# Altium PCB M2RB.PcbDoc (part 2 of 2)
Units mil, origin at the board's own origin, x right, y up, seen from the top; angles counter-clockwise.
Board outline 4750 x 3250 mil, 6 copper layers (Top Layer, Layer 1, Layer 2, Layer 3, Layer 4, Bottom Layer), stack 62.874 mil thick; 218 components, 161 nets, 1048 pads, 77 vias.
Unrouted connection lines stored in the file: 530.
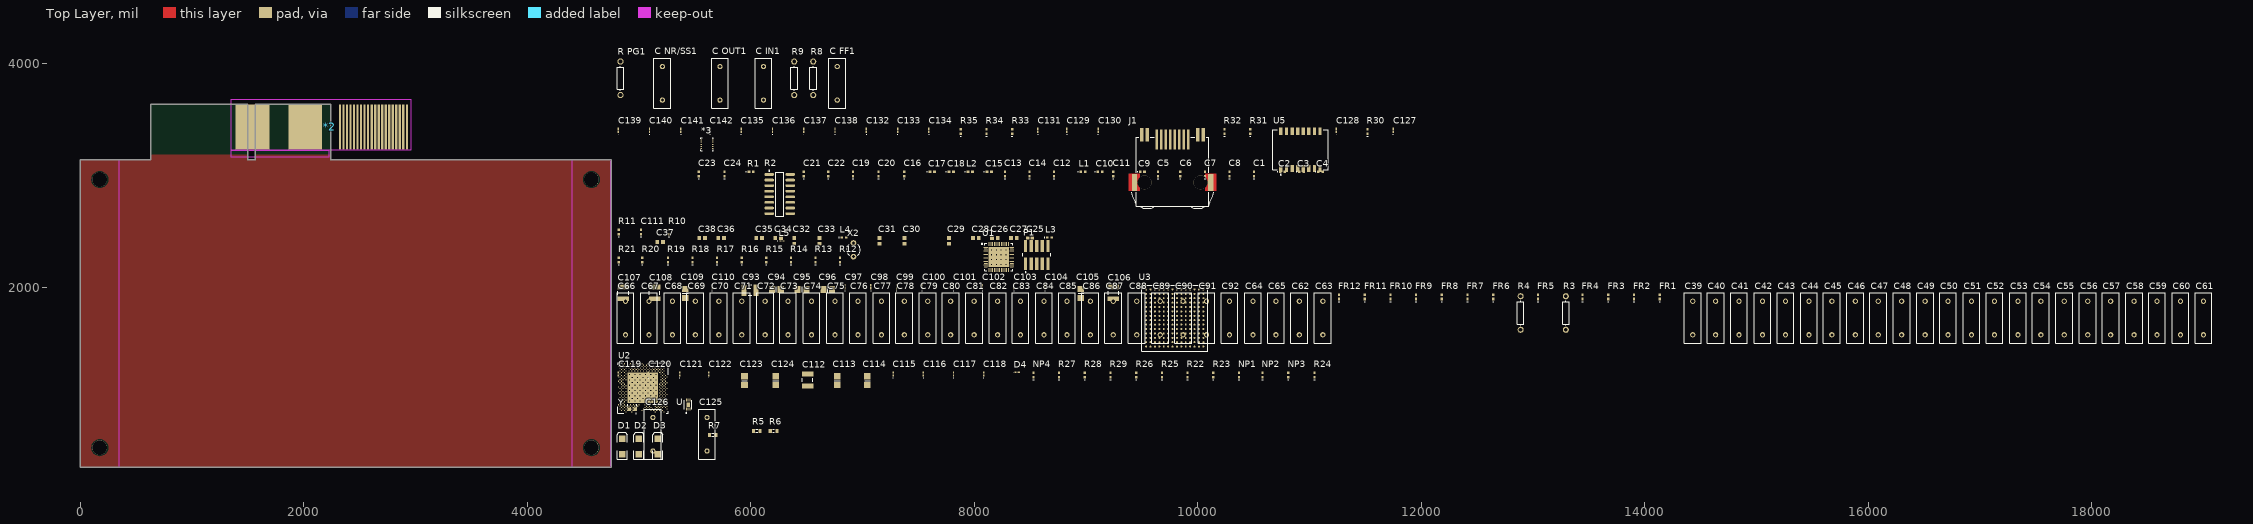
[diagram p0: Top Layer view]

## Via types
v1: diameter 11.81, hole 7.87, Top Layer to Bottom Layer, 61 vias
v2: diameter 19.68, hole 7.87, Top Layer to Bottom Layer, 16 vias

## Nets (pads, with @x,y where several pads share a name; then routed paths per layer and width w, separated by ;. In a path a pad name is that pad's centre, name@x,y a point inside that pad or via, vN(x,y) a via of type N, cw(c..) or ccw(c..) an arc to the next point about the centre after c; other vN are vias at no path point) (continued)
pads on no net: "R PG1.1" *2.2 *2.3 *2.4 *2.5 *2.6 *2.7 *2.8 *2.9 *2.10 *2.11 *2.12 *2.13 *2.14 *2.15 *2.16 *2.17 *2.18 *2.19 *2.20 *2.21 *2.24 *2.25 *2.26 *2.27 *2.28 *2.29 *2.30 *2.31 *2.32 *2.33 *2.34 *2.35 *2.36 *2.37 *2.38 *2.39 *2.40 *2.41 *2.42 *2.43 *3.2 J1.9 J1.10 J1.11 J1.12 J1.MH1 J1.MH2 L3.2 P1.8 R1.2 R2.2 R2.3 R2.4 R2.5 R2.6 R2.7 R2.8 R2.9 R2.10 R2.11 R2.12 R2.13 R2.14 R2.15 U1.4 U1.5 U1.6 U1.7 U1.8 U1.9 U1.10 U1.11 U1.12 U1.14 U1.15 U1.16 U1.17 U1.18 U1.19 U1.20 U1.22 U1.23 U1.27 U1.28 U1.29 U1.39 U1.40 U1.41 U1.42 U1.43 U1.44 U2.A5 U2.A9 U2.A13 U2.A21 U2.AA1 U2.AA3 U2.AA5 U2.AB2 U2.AB4 U2.AB6 U2.AC3 U2.AC5 U2.AD2 U2.AE1 U2.AE5 U2.AG3 U2.AG33 U2.AH2 U2.AH4 U2.AH32 U2.AJ1 U2.AJ3 U2.AJ5 U2.AJ11 U2.AJ13 U2.AJ15 U2.AJ21 U2.AJ27 U2.AJ29 U2.AJ31 U2.AJ33 U2.AK2 U2.AK4 U2.AK6 U2.AK8 U2.AK10 U2.AK14 U2.AK26 U2.AK28 U2.AK30 U2.AK32 U2.AK34 U2.AL3 U2.AL5 U2.AL7 U2.AL9 U2.AL11 U2.AL27 U2.AL29 U2.AL31 U2.AL33 U2.AM2 U2.AM4 U2.AM6 U2.AM8 U2.AM10 U2.AM12 U2.AM28 U2.AM30 U2.AM34 U2.AN3 U2.AN5 U2.AN7 U2.AN11 U2.AN27 U2.AN29 U2.AN31 U2.AP6 U2.AP30 U2.AP32 U2.B2 U2.B4 U2.B10 U2.B12 U2.B14 U2.B22 U2.C1 U2.C3 U2.C5 U2.C9 U2.C11 U2.C13 U2.C15 U2.C17 U2.C19 U2.C31 U2.D2 U2.D4 U2.D8 U2.D10 U2.D12 U2.D14 U2.D18 U2.D22 U2.D30 U2.D32 U2.E3 U2.E9 U2.E11 U2.E13 U2.E15 U2.E23 U2.E29 U2.E31 U2.F2 U2.F4 U2.F10 U2.F12 U2.F14 U2.F16 U2.F22 U2.F26 U2.F32 U2.G1 U2.G29 U2.H30 U2.J1 U2.J31 U2.K30 U2.K32 U2.K34 U2.L31 U2.M2 U2.M6 U2.M30 U2.M32 U2.N31 U2.N33 U2.P2 U2.P30 U2.P32 U2.P34 U2.R3 U2.R5 U2.R29 U2.T4 U2.T6 U2.U1 U2.U3 U2.U5 U2.V2 U2.V4 U2.V6 U2.W3 U2.Y2 U2.Y4 U2.Y6 U3.A2 U3.A3 U3.A4 U3.A5 U3.A7 U3.A10 U3.A12 U3.A13 U3.B1 U3.B2 U3.B3 U3.B5 U3.B6 U3.B13 U3.B14 U3.C1 U3.C3 U3.C4 U3.C5 U3.C10 U3.C12 U3.C14 U3.D1 U3.D2 U3.D3 U3.D4 U3.D10 U3.D12 U3.D13 U3.D14 U3.E2 U3.E4 U3.E11 U3.E12 U3.E13 U3.F1 U3.F2 U3.F3 U3.F4 U3.F11 U3.F12 U3.F13 U3.F14 U3.G1 U3.G2 U3.G4 U3.G8 U3.G11 U3.G14 U3.H1 U3.H2 U3.H3 U3.H4 U3.H7 U3.H11 U3.H12 U3.H13 U3.H14 U3.J1 U3.J2 U3.J3 U3.J4 U3.J7 U3.J8 U3.J11 U3.J12 U3.J13 U3.J14 U3.K2 U3.K3 U3.K4 U3.K11 U3.K12 U3.L1 U3.L2 U3.L3 U3.L5 U3.L12 U3.L13 U3.L14 U3.M1 U3.M2 U3.M3 U3.M4 U3.M5 U3.M6 U3.M10 U3.M11 U3.M12 U3.M13 U3.M14 U3.N1 U3.N2 U3.N4 U3.N10 U3.N11 U3.N14 U3.P2 U3.P3 U3.P4 U3.P5 U3.P6 U3.P7 U3.P10 U3.P11 U3.P12 U3.P13 U5.4 U5.5 U5.12 U5.13

## Polygon pours and split planes (outlines as drawn)
no net on Layer 1 "NONET_L02_P004" (solid, pour order 4): 0.5,389.5 0.5,3139.5 633.87,3139.5 633.87,3639.5 1498.87,3639.5 1498.87,3139.5 1568.87,3139.5 1568.87,3639.5 2243.86,3639.5 2243.86,3139.5 4750.5,3139.5 4750.5,389.5
no net on Layer 4 "NONET_L05_P005" (solid, pour order 5): 0.5,389.5 0.5,3139.5 633.87,3139.5 633.87,3639.5 1498.87,3639.5 1498.87,3139.5 1568.87,3139.5 1568.87,3639.5 2243.86,3639.5 2243.86,3139.5 4750.5,3139.5 4750.5,389.5
no net on Layer 2 "NONET_L03_P006" (solid, pour order 6): 0.5,389.5 0.5,3139.5 633.87,3139.5 633.87,3639.5 1498.87,3639.5 1498.87,3139.5 1568.87,3139.5 1568.87,3639.5 2243.86,3639.5 2243.86,3139.5 4750.5,3139.5 4750.5,389.5
no net on Layer 3 "NONET_L04_P007" (solid, pour order 7): 0.5,389.5 0.5,3139.5 633.87,3139.5 633.87,3639.5 1498.87,3639.5 1498.87,3139.5 1568.87,3139.5 1568.87,3639.5 2243.86,3639.5 2243.86,3139.5 4750.5,3139.5 4750.5,389.5
no net on Top Layer "NONET_L01_P002" (solid, pour order 2): 0.5,389.5 0.5,3139.5 633.87,3139.5 633.87,3639.5 1498.87,3639.5 1498.87,3139.5 1568.87,3139.5 1568.87,3639.5 2243.86,3639.5 2243.86,3139.5 4750.5,3139.5 4750.5,389.5
no net on Bottom Layer "NONET_L06_P003" (solid, pour order 3): 0.5,389.5 0.5,3139.5 633.87,3139.5 633.87,3639.5 1498.87,3639.5 1498.87,3139.5 1568.87,3139.5 1568.87,3639.5 2243.86,3639.5 2243.86,3139.5 4750.5,3139.5 4750.5,389.5

## Keep-outs
Keep-Out Layer:
  rectangle: 4400,390 4750,3140
  rectangle: 0,390 350,3140

## Silkscreen, mask and mechanical layers (free items; w line width, h text height)
Mechanical 1:
  circle w0.5: c4575.5,564.5 r64.25
  circle w0.5: c4575.5,2964.5 r64.25
  circle w0.5: c175.5,2964.5 r64.25
  circle w0.5: c175.5,564.5 r64.25
  lines w0.5: 629.37,3639.5 1494.37,3639.5 ; 633.87,3639.5 633.87,3139.5 0.5,3139.5 0.5,389.5 4750.5,389.5 4750.5,3139.5 2243.86,3139.5 2243.86,3639.5 ; 1498.87,3639.5 1498.87,3139.5 1568.87,3139.5 1568.87,3639.5 ; 1564.37,3639.5 2239.36,3639.5